# Altium PCB ADConv.PcbDoc
Units mm, origin at the board's own origin, x right, y up, seen from the top; angles counter-clockwise.
Board outline 91 x 102 mm, 2 copper layers (Top Layer, Bottom Layer); 115 components, 64 nets, 341 pads, 67 vias.
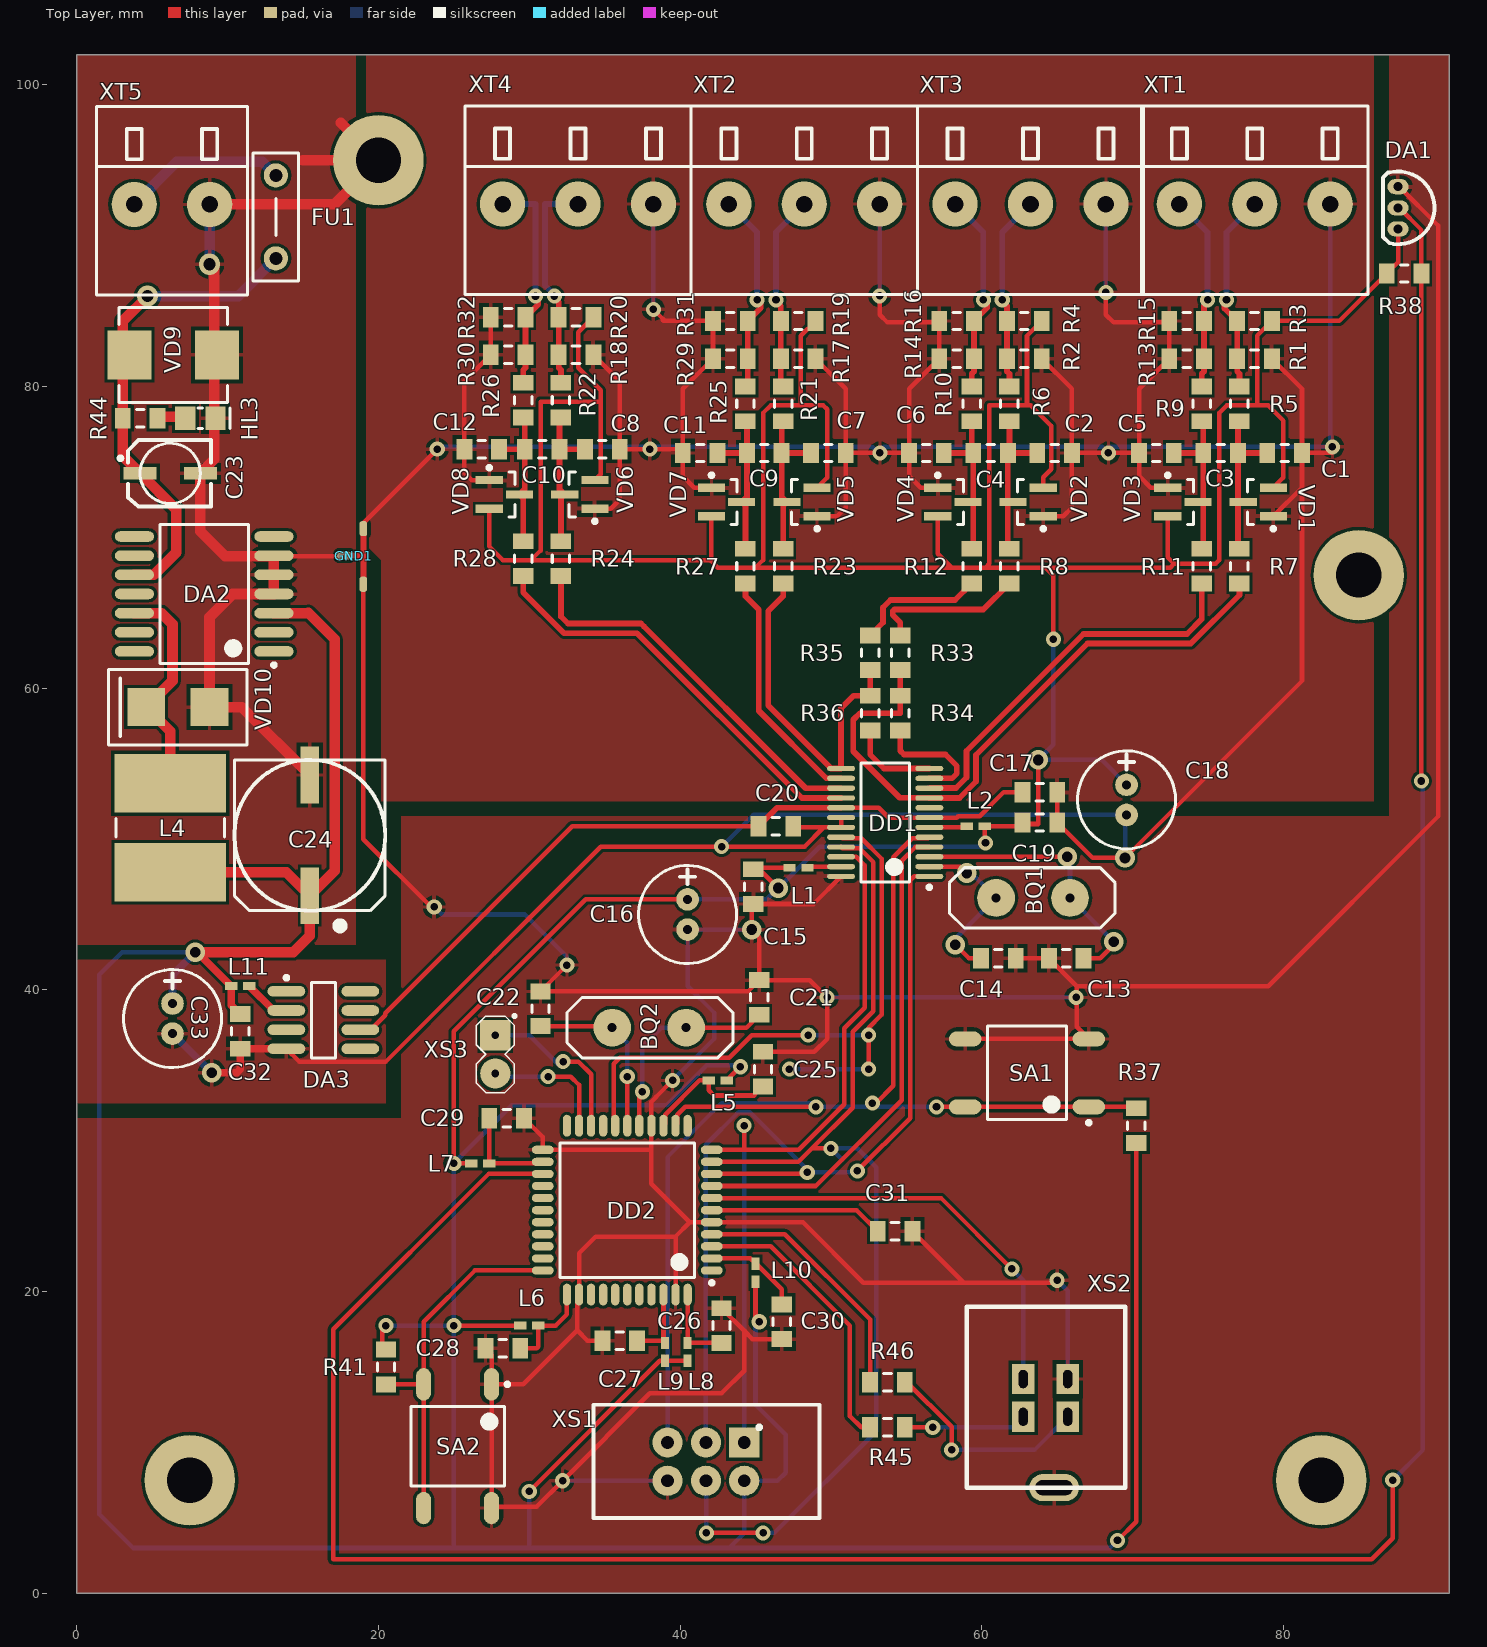
[diagram p0: Top Layer view]
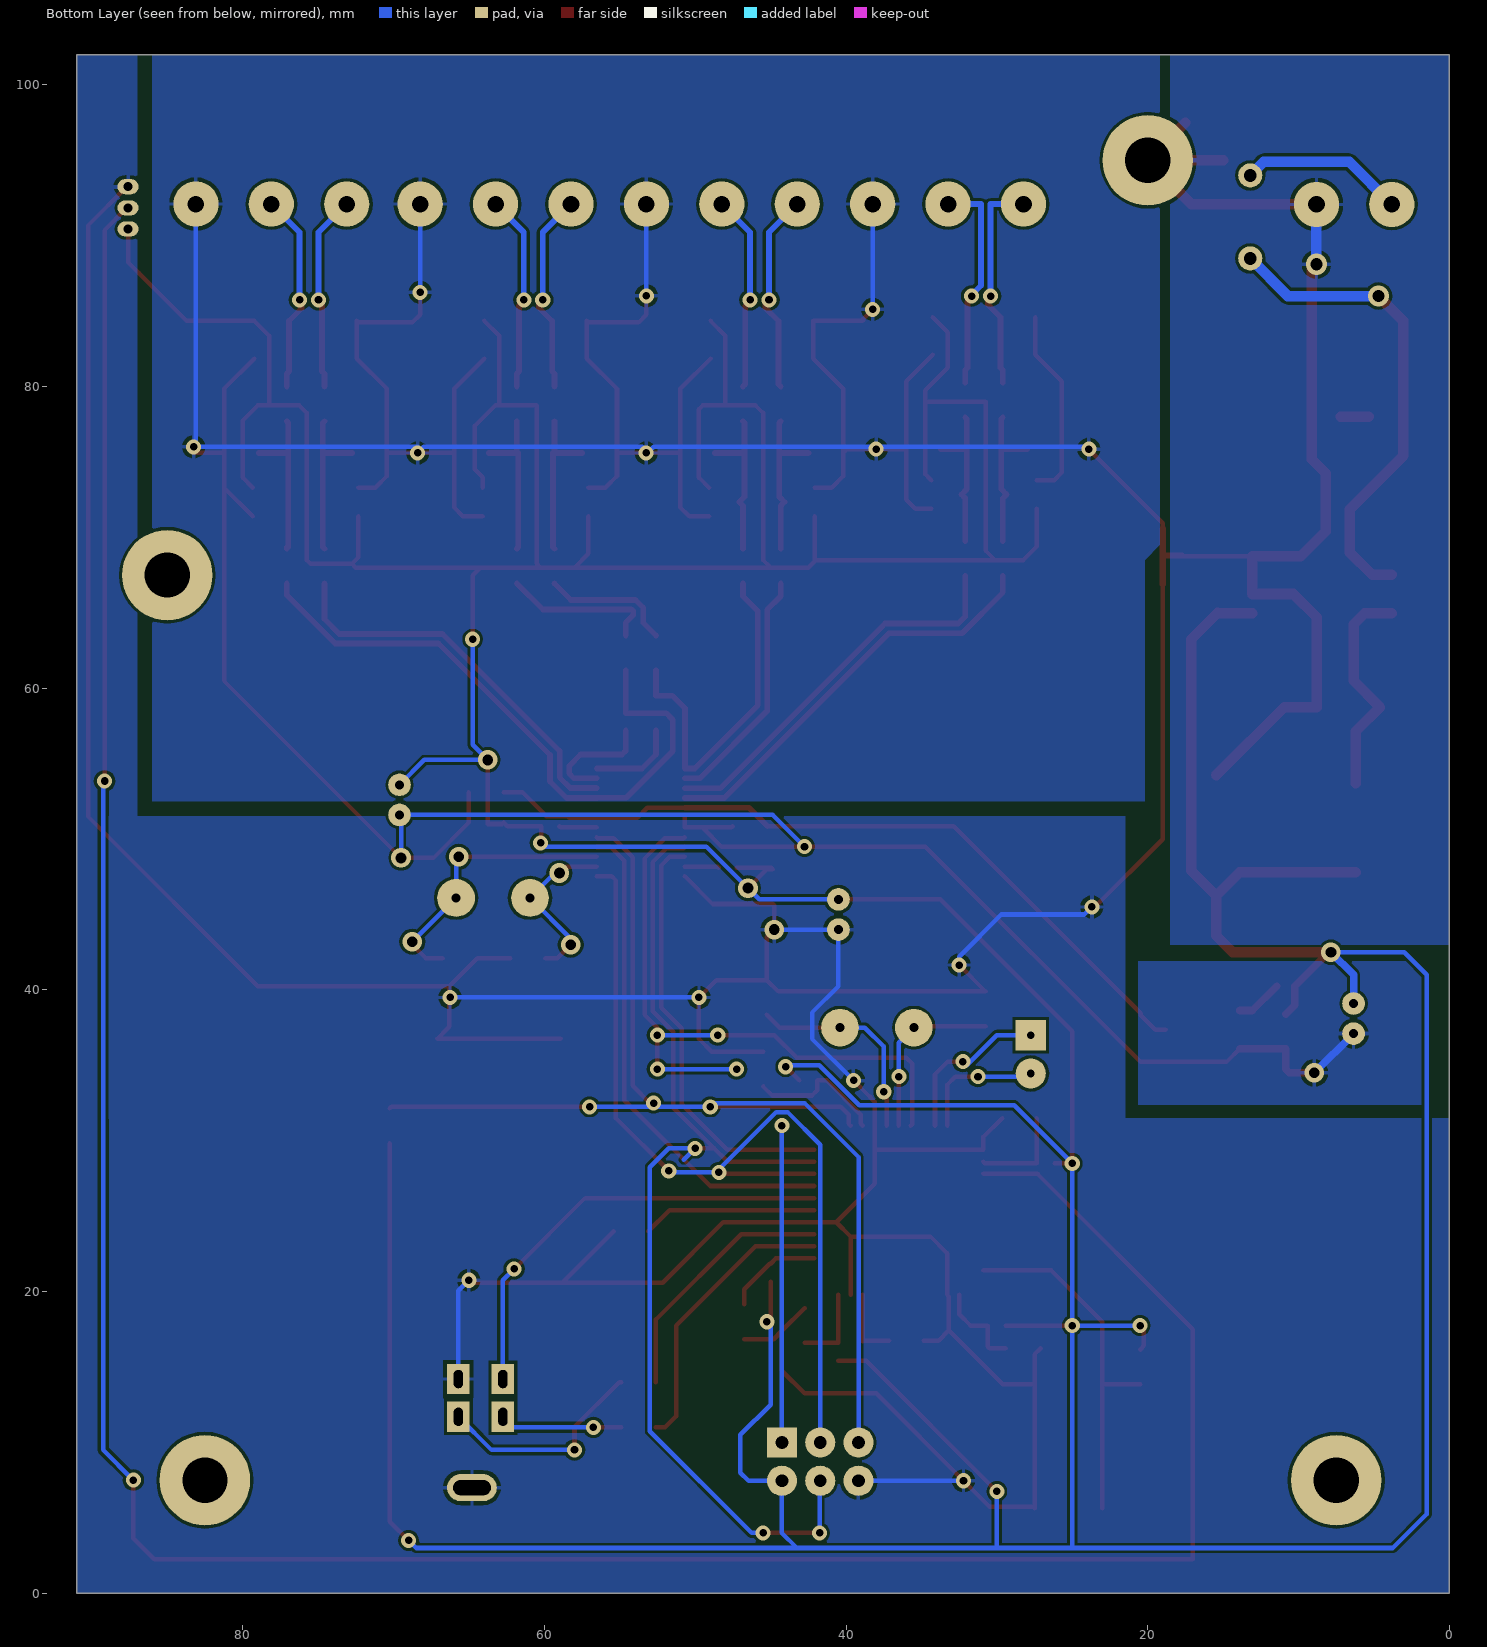
[diagram p1: Bottom Layer view, seen from below]

## Layer stack, top to bottom
Top Solder: solder mask 0.0102, Solder Resist, Dk 3.5
Top Layer: signal copper 0.0356
Dielectric 1: dielectric 0.32, FR-4, Dk 4.8
Bottom Layer: signal copper 0.0356
Bottom Solder: solder mask 0.0102, Solder Resist, Dk 3.5

## Board outline
0,0 91,0 91,102 0,102

## Design rules (kind name [scope] priority, off if disabled: settings)
Clearance Clearance_Poly [InPolygon] p1: gap=0.2
Clearance Clearance_Net [IsNet vs IsNet] p2: gap=0.15
Clearance Clearance_Atmega [(HasFootprint('44ML_L') AND InPadClass('All Pads')) vs (HasFootprint('44ML_L') AND InPadClass('All Pads'))] p3: gap=0.2
Clearance [All] p4: gap=0.254
ComponentClearance 330-031 [(IsComponent AND HasFootprint('330-031-12')) vs (IsComponent AND HasFootprint('330-031-12'))] p1: gap=0 collisioncheckmode=3 verticalgap=0 showdistances=FALSE
ComponentClearance [All] p2: gap=0.254 collisioncheckmode=3 verticalgap=0.254 showdistances=FALSE
DiffPairsRouting [All] p1: maxlimit=0.254 minlimit=0.254 mostfreqgap=0.254 toplayer_minwidth=0.381 toplayer_maxwidth=0.381 toplayer_prefwidth=0.381 bottomlayer_minwidth=0.381 bottomlayer_maxwidth=0.381 bottomlayer_prefwidth=0.381 maxuncoupledlength=12.7
HoleSize [All And (Not (IsVia))] p1: absolutevalues=TRUE maxlimit=2.54 minlimit=0.6 maxpercent=80.000 minpercent=20.000
MinimumSolderMaskSliver [All] p1: minsoldermaskwidth=0.075
PolygonConnect [All] p1: connectstyle=Relief reliefconductorwidth=0.254 reliefentries=4 polygonreliefangle="90 Angle" airgapwidth=0.254
RoomDefinition U_Power [InComponentClass('U_Power')] p1: confinementstyle=ConfineIn formatcopy=TRUE lockcomponents=FALSE outline -0.058,13.25 57,13.25 57,100.591 -0.058,100.591
RoomDefinition U_USB [InComponentClass('U_USB')] p2: confinementstyle=ConfineIn formatcopy=TRUE lockcomponents=FALSE outline 71.75,43.4 21.35,43.4 21.35,1.5 71.75,1.5
RoomDefinition U_Main [InComponentClass('U_Main')] p3: confinementstyle=ConfineIn formatcopy=TRUE lockcomponents=FALSE outline 19,1.6 90.25,1.6 90.25,100.6 19,100.6
RoomDefinition U_DiffInput [InComponentClass('U_DiffInput')] p4: confinementstyle=ConfineIn formatcopy=TRUE lockcomponents=FALSE outline 23.1,65.6 87.85,65.6 87.85,85.85 23.1,85.85
RoutingVias [All] p1: holewidth=0.9 width=1.5 viastyle="Through Hole" minholewidth=0.5 minwidth=1 maxholewidth=0.8 maxwidth=1.4
SolderMaskExpansion [All] p1: expansion=0.102
Width [All] p1: maxlimit=0.7 minlimit=0.3 preferedwidth=0.5
25 further rules are at their usual default settings.

## Classes and differential pairs
component class U_DiffInput: C1 C2 C3 C4 C5 C6 C7 C8 C9 C10 C11 C12 R1 R2 R3 R4 R5 R6 R7 R8 R9 R10 R11 R12 R13 R14 R15 R16 R17 R18 R19 R20 R21 R22 R23 R24 R25 R26 R27 R28 R29 R30 R31 R32 VD1 VD2 VD3 VD4 VD5 VD6 VD7 VD8
component class U_Main: BQ1 BQ2 C13 C14 C15 C16 C17 C18 C19 C20 C21 C22 DA1 DD1 L1 L2 R33 R34 R35 R36 R37 R38 R41 SA1 SA2 XS1 XS3 XT1 XT2 XT3 XT4
component class U_Power: C23 C24 C25 C26 C27 C28 C29 C30 C31 C32 C33 DA2 DA3 FU1 GND1 HL3 L4 L5 L6 L7 L8 L9 L10 L11 R44 VD9 VD10 XT5
component class U_USB: DD2 R45 R46 XS2
differential pair DINPUT1: +DINPUT1_P -DINPUT1_N
differential pair DINPUT2: +DINPUT2_P -DINPUT2_N
differential pair DINPUT3: +DINPUT3_P -DINPUT3_N
differential pair DINPUT4: +DINPUT4_P -DINPUT4_N
differential pair INPUT_FD1: +INPUT_FD1_P -NetC3_1
differential pair INPUT_FD2: +INPUT_FD2_P -INPUT_FD2_N
differential pair INPUT_FD3: +INPUT_FD3_P -INPUT_FD3_N
differential pair INPUT_FD4: +INPUT_FD4_P -INPUT_FD4_N
differential pair INPUT_P1: +INPUT_P1_P -INPUT_P1_N
differential pair INPUT_P2: +INPUT_P2_P -INPUT_P2_N
differential pair INPUT_P3: +INPUT_P3_P -INPUT_P3_N
differential pair INPUT_P4: +INPUT_P4_P -INPUT_P4_N

## Components (designator, comment, footprint, x,y, rotation, side; value= is the part's Value field where it differs from the comment)
BQ1 "6 МГц" HC-49/S 65.85,46.1 r180 top
BQ2 "16 МГц" HC-49/S 35.5,37.5 r0 top
C1 "10n" SMDRC0805 80.082,75.6 r0 top
C2 "10n" SMDRC0805 64.832,75.6 r0 top
C3 "100n" SMDRC0805 75.832,75.6 r0 top
C4 "100n" SMDRC0805 60.582,75.6 r0 top
C5 "10n" SMDRC0805 71.582,75.6 r0 top
C6 "10n" SMDRC0805 56.332,75.6 r0 top
C7 "10n" SMDRC0805 49.832,75.6 r0 top
C8 "10n" SMDRC0805 34.85,75.85 r0 top
C9 "100n" SMDRC0805 45.582,75.6 r0 top
C10 "100n" SMDRC0805 30.85,75.85 r0 top
C11 "10n" SMDRC0805 41.332,75.6 r0 top
C12 "10n" SMDRC0805 26.85,75.85 r0 top
C13 "20p" SMDRC0805 65.6,42.1 r0 top
C14 "20p" SMDRC0805 61.1,42.1 r180 top
C15 "100n" SMDRC0805 44.85,46.85 r270 top
C16 "К-50-6" К50-6 40.5,45 r90 top
C17 "100n" SMDRC0805 63.85,53.1 r180 top
C18 "К-50-6" К50-6 69.6,52.6 r90 top
C19 "100n" SMDRC0805 63.85,51.1 r0 top
C20 "100n" SMDRC0805 46.35,50.85 r0 top
C21 "20p" SMDRC0805 45.25,39.5 r270 top
C22 "20p" SMDRC0805 30.75,38.75 r270 top
C23 "CA050M2R20REB-0405" CAP_POLAR_ELLYTE_B 6.2,74.25 r0 top
C24 "CA035M0220REG" CAP_POLAR_ELLYTE_G 15.45,50.25 r270 top
C25 "100n" SMDRC0805 45.5,34.75 r90 top
C26 "100n" SMDRC0805 42.75,17.75 r90 top
C27 "100n" SMDRC0805 36,16.75 r180 top
C28 "100n" SMDRC0805 28.25,16.25 r180 top
C29 "100n" SMDRC0805 28.5,31.5 r0 top
C30 "100n" SMDRC0805 46.75,18 r270 top
C31 "1u" SMDRC0805 54.25,24 r0 top
C32 "100n" SMDRC0805 10.85,37.25 r90 top
C33 "К-50-6" К50-6 6.35,38.1 r90 top
DA1 "DS1820" L78L09 87.6,91.85 r0 top
DA2 "LM2574M-5.0" SOIC127P1030X264-14M 8.45,66.25 r180 top
DA3 "ADR421BRZ" SO8 16.35,38 r0 top
DD1 "AD7739BRUZ" TSSOP-RU-24 53.6,51.1 r180 top
DD2 "ATMega32U4-AU" 44ML_L 36.5,25.4 r180 top
FU1 "EFuse LP60-110F" "EFuse 1.1A" 13.2,94 r270 top
GND1 "ComGND" ComGND 19,68.8 r270 top net-tie
HL3 "Green" DIOMELF2012M 8.2,77.9 r0 top
L1 "MPZ1608S181A" INDC0603X03M 47.85,48.1 r180 top
L2 "MPZ1608S181A" INDC0603X03M 59.6,50.85 r180 top
L4 "SCD0705T-331K-N" INDP7972X50M 6.2,50.75 r90 top
L5 "MPZ1608S181A" INDC0603X03M 42.5,34 r180 top
L6 "MPZ1608S181A" INDC0603X03M 30,17.75 r0 top
L7 "MPZ1608S181A" INDC0603X03M 26.75,28.5 r0 top
L8 "MPZ1608S181A" INDC0603X03M 40.5,16 r90 top
L9 "MPZ1608S181A" INDC0603X03M 39,16 r90 top
L10 "MPZ1608S181A" INDC0603X03M 45,21.25 r90 top
L11 "MPZ1608S181A" INDC0603X03M 10.85,40.25 r180 top
R1 "10M" SMDRC0805 78.082,81.85 r0 top
R2 "10M" SMDRC0805 62.832,81.85 r0 top
R3 "10M" SMDRC0805 78.082,84.35 r0 top
R4 "10M" SMDRC0805 62.832,84.35 r0 top
R5 "100k" SMDRC0805 77.082,78.85 r270 top
R6 "100k" SMDRC0805 61.832,78.85 r270 top
R7 "30" SMDRC0805 77.082,68.1 r270 top
R8 "30" SMDRC0805 61.832,68.1 r270 top
R9 "100k" SMDRC0805 74.582,78.85 r270 top
R10 "100k" SMDRC0805 59.332,78.85 r270 top
R11 "30" SMDRC0805 74.582,68.1 r270 top
R12 "30" SMDRC0805 59.332,68.1 r270 top
R13 "10M" SMDRC0805 73.582,81.85 r0 top
R14 "10M" SMDRC0805 58.332,81.85 r0 top
R15 "10M" SMDRC0805 73.582,84.35 r0 top
R16 "10M" SMDRC0805 58.332,84.35 r0 top
R17 "10M" SMDRC0805 47.832,81.85 r0 top
R18 "10M" SMDRC0805 33.1,82.1 r0 top
R19 "10M" SMDRC0805 47.832,84.35 r0 top
R20 "10M" SMDRC0805 33.1,84.6 r0 top
R21 "100k" SMDRC0805 46.832,78.85 r270 top
R22 "100k" SMDRC0805 32.1,79.1 r270 top
R23 "30" SMDRC0805 46.832,68.1 r270 top
R24 "30" SMDRC0805 32.1,68.6 r270 top
R25 "100k" SMDRC0805 44.332,78.85 r270 top
R26 "100k" SMDRC0805 29.6,79.1 r270 top
R27 "30" SMDRC0805 44.332,68.1 r270 top
R28 "30" SMDRC0805 29.6,68.6 r270 top
R29 "10M" SMDRC0805 43.332,81.85 r0 top
R30 "10M" SMDRC0805 28.6,82.1 r0 top
R31 "10M" SMDRC0805 43.332,84.35 r0 top
R32 "10M" SMDRC0805 28.6,84.6 r0 top
R33 "1" SMDRC0805 54.6,62.35 r270 top
R34 "1" SMDRC0805 54.6,58.35 r270 top
R35 "1" SMDRC0805 52.6,62.35 r270 top
R36 "1" SMDRC0805 52.6,58.35 r270 top
R37 "10k" SMDRC0805 70.25,31 r270 top
R38 "4,7k" SMDRC0805 88,87.5 r180 top
R41 "10k" SMDRC0805 20.5,15 r90 top
R44 "750" SMDRC0805 4.2,77.9 r180 top
R45 "22" SMDRC0805 53.75,11 r0 top
R46 "22" SMDRC0805 53.75,14 r0 top
SA1 "DTSM20-4.3" DTSM20 63,34.5 r180 top
SA2 "DTSM20-4.3" DTSM20 25.25,9.75 r270 top
VD1 "BAV199" "SOT23 (TO-236AB)" 78.332,72.35 r180 top
VD2 "BAV199" "SOT23 (TO-236AB)" 63.082,72.35 r180 top
VD3 "BAV199" "SOT23 (TO-236AB)" 73.332,72.35 r0 top
VD4 "BAV199" "SOT23 (TO-236AB)" 58.082,72.35 r0 top
VD5 "BAV199" "SOT23 (TO-236AB)" 48.082,72.35 r180 top
VD6 "BAV199" "SOT23 (TO-236AB)" 33.35,72.85 r180 top
VD7 "BAV199" "SOT23 (TO-236AB)" 43.082,72.35 r0 top
VD8 "BAV199" "SOT23 (TO-236AB)" 28.35,72.85 r0 top
VD9 "SM15T12CA" SUPRES3216X18N 6.4,82.1 r180 top
VD10 "10BQ060TRPBF" "SHOTKY 4.1x3.3" 6.7,58.75 r180 top
XS1 "IDC-06M" IDC-06M 44.25,10 r270 top
XS2 "USB B A-09 РОЗЕТКА НА ПЛАТУ" USB2.0B_Vertical 69.5,7 r90 top
XS3 "PLS-02" PLS-02 27.75,37 r270 top
XT1 "330-031-12" 330-031-12 83.1,92.1 r180 top
XT2 "330-031-12" 330-031-12 53.232,92.1 r180 top
XT3 "330-031-12" 330-031-12 68.232,92.1 r180 top
XT4 "330-031-12" 330-031-12 38.232,92.1 r180 top
XT5 "330-021-12" 330-021-12 3.81,92.075 r0 top

## Footprints (in the part's own frame and the unit in brackets; to place one, negate y for a bottom-side part, rotate by r counter-clockwise, add the part's x,y. Pads: shape width x height; smd on the part's side, far side on the other; paste and mask are expansions set on the pad)
44ML_L [mm] "Thin QFP, 44-Leads, Body 10x10mm, Pitch 0.8mm, IPC High Density"
  oval 1.45x0.55 smd: 1(-5.6,4) 2(-5.6,3.2) 3(-5.6,2.4) 4(-5.6,1.6) 5(-5.6,0.8) 6(-5.6,0) 7(-5.6,-0.8) 8(-5.6,-1.6) 9(-5.6,-2.4) 10(-5.6,-3.2) 11(-5.6,-4) 23(5.6,-4) 24(5.6,-3.2) 25(5.6,-2.4) 26(5.6,-1.6) 27(5.6,-0.8) 28(5.6,0) 29(5.6,0.8) 30(5.6,1.6) 31(5.6,2.4) 32(5.6,3.2) 33(5.6,4)
  oval 0.55x1.45 smd: 12(-4,-5.6) 13(-3.2,-5.6) 14(-2.4,-5.6) 15(-1.6,-5.6) 16(-0.8,-5.6) 17(0,-5.6) 18(0.8,-5.6) 19(1.6,-5.6) 20(2.4,-5.6) 21(3.2,-5.6) 22(4,-5.6) 34(4,5.6) 35(3.2,5.6) 36(2.4,5.6) 37(1.6,5.6) 38(0.8,5.6) 39(0,5.6) 40(-0.8,5.6) 41(-1.6,5.6) 42(-2.4,5.6) 43(-3.2,5.6) 44(-4,5.6)
  silkscreen extent -5.72,-4.45 4.45,4.95, body extent -5,-5 5,5, height 1.2
330-021-12 [mm]
  round 3 hole 1.1: 1(0,0) 2(5,0)
  silkscreen extent -2.5,-6 7.5,6.5, body extent -2.5,-6.5 7.5,6, height 12.5
330-031-12 [mm]
  round 3 hole 1.1: 1(0,0) 2(5,0) 3(10,0)
  silkscreen extent -2.5,-6.5 12.5,6, body extent -2.5,-6.5 12.5,6, height 12.5
CAP_POLAR_ELLYTE_B [mm] "Surface Mount Aluminum Electrolytic (size code B)"
  rect 2.2x0.85 smd: 1(2,0) 2(-2,0)
  silkscreen extent -3.42,-2.2 2.7,2.2, body extent -2.3,-2.15 2.3,2.15, height 5.41
CAP_POLAR_ELLYTE_G [mm] "Surface Mount Aluminum Electrolytic (size code G)"
  rect 3.75x1.2 smd: 1(-4,0) 2(4,0)
  silkscreen extent -5,-5 6.25,5, body extent -5.8,-5.15 5.8,5.15, height 10.21
ComGND [mm]
  rrect70% 1x0.5 smd: 1(-1.778,0) 3(1.905,0)
  rrect70% 0.5x1 smd: 2(0,-1.27)
  Top Layer lines w0.4: 0,-1.27 0,0 ; 1.905,0 -1.778,0
DIOMELF2012M [mm] "MELF Diode, 2-Leads, Body 2,00x1,20mm, IPC Low Density"
  rect 1.35x1.55 smd: 1(-1,0) 2(1,0)
  silkscreen extent -0.15,-0.67 1.97,0.67, body extent -1,-0.6 1,0.6, height 1.2
DTSM20 [mm] "DTSM20 button footprint"
  oval 2.15x1 smd: 1(-4.1,2.25) 1(4.1,2.25) 2(-4.1,-2.25) 2(4.1,-2.25)
  silkscreen extent -4.23,-3.1 2.63,3.42, body extent -3.1,-3.1 3.1,3.1, height 5.5
"EFuse 1.1A" [mm]
  round 1.6 hole 0.85: 1(0,0) 2(5.5,0)
  silkscreen extent -1.5,-1.5 7,1.5, body extent -3.23,-0.5 8.73,0.5, height 12.99
HC-49/S [mm]
  round 2.5 hole 0.6: 1(0,0) 2(4.9,0)
  silkscreen extent -3,-2 8,2, body extent -3.5,-2.5 8.5,2.5, height 3.5
IDC-06M [mm]
  rect 2x2 hole 0.85: 1(0,0)
  round 2 hole 0.85: 2(2.54,0) 3(0,-2.54) 4(2.54,-2.54) 5(0,-5.08) 6(2.54,-5.08)
  silkscreen extent -2.5,-10 5,5, body extent -2.5,-10 5,5, height 8.4
INDC0603X03M [mm] "Chip Inductor, 2-Leads, Body 0,60x0,30mm, IPC Low Density"
  rect 0.82x0.52 smd: 1(-0.595,0) 2(0.595,0)
  body extent -0.3,-0.15 0.3,0.15, height 0.3
INDP7972X50M [mm] "Precision Wire Wound Inductor, 2-Leads, Body 7,90x7,20mm, IPC Low Density"
  rect 3.9x7.4 smd: 1(-2.95,0) 2(2.95,0)
  silkscreen extent -0.6,-3.6 0.6,3.6, body extent -3.95,-3.6 3.95,3.6, height 5
L78L09 [mm] "TO-92"
  oval 1.4x1 hole 0.6: 1(0,1.4) 2(0,0) 3(0,-1.4)
  silkscreen extent -1,-2.41 2.41,2.41
PLS-02 [mm] "вилка на плату"
  rect 2x2 hole 0.5: 1(0,0)
  round 2 hole 0.5: 2(2.54,0)
  silkscreen extent -1.37,-1.27 3.81,1.37, body extent -1.27,-1.25 3.81,1.25, height 8.6
"SHOTKY 4.1x3.3" [mm]
  rect 2.5x2.5 smd: A(-2.1,0) K(2.1,0)
  silkscreen extent -4.6,-2.5 4.6,2.5
SMDRC0805 [mm] "Chip Resistor, 2-Leads, Body 2,00x1,20mm, IPC Low Density"
  rect 1.05x1.35 smd: 1(-1.15,0) 2(1.15,0)
  silkscreen extent -0.25,-0.58 0.25,0.58, body extent -1,-0.6 1,0.6, height 0.4
SO8 [mm] "SOIC, 8-Leads, Body 4,90x3,90mm, Pitch 1,27mm, IPC Low Density"
  oval 2.5x0.7 smd: 1(-2.45,1.905) 2(-2.45,0.635) 3(-2.45,-0.635) 4(-2.45,-1.905) 5(2.45,-1.905) 6(2.45,-0.635) 7(2.45,0.635) 8(2.45,1.905)
  silkscreen extent -2.57,-2.5 0.8,2.93, body extent -2,-2.5 2,2.5, height 1.75
SOIC127P1030X264-14M [mm] "SOIC, 14-Leads, Body 8,99x7,49mm, Pitch 1,27mm, IPC Low Density"
  oval 2.6x0.7 smd: 1(-4.625,3.81) 2(-4.625,2.54) 3(-4.625,1.27) 4(-4.625,0) 5(-4.625,-1.27) 6(-4.625,-2.54) 7(-4.625,-3.81) 8(4.625,-3.81) 9(4.625,-2.54) 10(4.625,-1.27) 11(4.625,0) 12(4.625,1.27) 13(4.625,2.54) 14(4.625,3.81)
  silkscreen extent -4.75,-4.6 2.93,4.83, body extent -3.8,-4.6 3.8,4.6, height 2.65
"SOT23 (TO-236AB)" [mm] "SOT23, 3-Leads, Body 2,90x2,45mm, Pitch 0,95mm, IPC Low Density"
  rect 1.8x0.55 smd: 1(-1,0.95) 2(-1,-0.95) 3(1,0)
  silkscreen extent -1.13,-1.5 0.7,1.9, body extent -0.7,-1.5 0.7,1.5, height 1.1
SUPRES3216X18N [mm]
  rect 2.9x3.25 smd: 1(-2.9,0) 2(2.9,0)
  silkscreen extent -3.6,-3.15 3.6,3.15, body extent -3.57,-3.13 3.58,3.13, height 2.65
TSSOP-RU-24 [mm] "TSOP, 24-Leads, Body 7,80x4,40mm, Pitch 0,65mm, IPC Low Density"
  oval 1.85x0.35 smd: 1(-2.925,3.575) 2(-2.925,2.925) 3(-2.925,2.275) 4(-2.925,1.625) 5(-2.925,0.975) 6(-2.925,0.325) 7(-2.925,-0.325) 8(-2.925,-0.975) 9(-2.925,-1.625) 10(-2.925,-2.275) 11(-2.925,-2.925) 12(-2.925,-3.575) 13(2.925,-3.575) 14(2.925,-2.925) 15(2.925,-2.275) 16(2.925,-1.625) 17(2.925,-0.975) 18(2.925,-0.325) 19(2.925,0.325) 20(2.925,0.975) 21(2.925,1.625) 22(2.925,2.275) 23(2.925,2.925) 24(2.925,3.575)
  silkscreen extent -3.05,-3.95 1.6,4.42, body extent -2.25,-3.95 2.25,3.95, height 1.2
USB2.0B_Vertical [mm] "Connector; USB1.1, Type B, Thru-Hole; 4 Position; Right Angle"
  rect 2x1.5 hole 0.6 slot 1.2 at 0 deg: D+(4.7,3.8) D-(4.7,6.75) GND(7.2,3.8) VCC(7.2,6.75)
  oval 1.8x3.3 hole 1 slot 2.5 at 90 deg: SHLD(0,4.7)
  silkscreen extent 0,0 12,10.5, body extent 0,0 12,10.5, height 16
К50-6 [mm]
  round 1.5 hole 0.6: 1(-1,0) 2(1,0)
  silkscreen extent -3.25,-3.25 3.25,3.25, body extent -3.08,-2.99 3,2.99, height 15.1

## Part data
BQ1: library part Piezoelectric_6000, "Piezoelectric elements"
BQ2: library part Piezoelectric_16000, "Piezoelectric elements"
C1 C2 C5 C6 C7 C8 C11 C12: library part "Capacitor 0805 10n", "Generic capasitor non-polar"
C3 C4 C9 C10 C15 C17 C19 C20 C25 C26 C27 C28 C29 C30 C32: library part "Capacitor 0805 100n", "Generic capasitor non-polar"
C13 C14 C21 C22: library part "Capacitor 0805 20p", "Generic capasitor non-polar"
C16 C18 C33: library part 10000_006-К50, "10uF 6,3V Polar through-hole cap"
C23: library part 02200_050, "2,2uF 50V Polar capacitor"
C24: library part 220000_035, "220uF 35V Polar capacitor"
C31: library part "Capacitor 0805 1u", "Generic capasitor non-polar"
DA1: library part T_DS1820, "Precision Micropower Shunt Voltage Reference"
DA3: "IC VREF SERIES 2.5V 8SOIC"
DD1: library part AD7739, "IC ADC 24BIT 8-CH 24-TSSOP"
DD2: library part ATMega32U4
FU1: "Fuse"
HL3: library part LED1_G, "Diod LED SMD Green"
L1 L2 L5 L6 L7 L8 L9 L10 L11: library part "Ferrite Bead", "Ferrite Bead"
L4: "Inductor"
R1 R2 R3 R4 R13 R14 R15 R16 R17 R18 R19 R20 R29 R30 R31 R32: library part "Resistor 0805 10M", "Generic resistor"
R5 R6 R9 R10 R21 R22 R25 R26: library part "Resistor 0805 100k", "Generic resistor"
R7 R8 R11 R12 R23 R24 R27 R28: library part "Resistor 0805 30", "Generic resistor"
R33 R34 R35 R36: library part "Resistor 0805 1", "Generic resistor"
R37 R41: library part "Resistor 0805 10k", "Generic resistor"
R38: library part "Resistor 0805 4,7k", "Generic resistor"
R44: library part "Resistor 0805 750", "Generic resistor"
R45 R46: library part "Resistor 0805 22", "Generic resistor"
SA1 SA2: library part Switch1_DTSM20-4.3, "Switch open"
VD1 VD2 VD3 VD4 VD5 VD6 VD7 VD8: "Epitaxial, medium-speed switching,  double diode in a small SOT23 plastic  SMD package. The diodes are  connected in series."
VD9: "Diod suppressor"
VD10: "DIODE SCHOTTKY 60V 1A DO214AA"
XS1: library part "Con6_M IDC-06M_SPI", "SPI connector"
XS2: library part USB2.0-BR, "USB-B Vertical"
XS3: library part Con2_M_PLS-02, "Male 2-pin connection"
XT1 XT2 XT3 XT4: library part "Con3_D 330-031-12", "Demountable connection 3-pin"
XT5: library part "Con2_D 330-021-12", "Demountable connection  2-pin"

## Free pads (board coordinates)
  round 6 hole 3: 0(7.5,7.5) 0(20,95) 0(82.5,7.5) 0(85,67.5)

## Via types
v1: diameter 1, hole 0.5, Top Layer to Bottom Layer, 55 vias
v2: diameter 1.3, hole 0.711, Top Layer to Bottom Layer, 10 vias
v3: diameter 1.4, hole 0.8, Top Layer to Bottom Layer, 2 vias

## Nets (pads, with @x,y where several pads share a name; then routed paths per layer and width w, separated by ;. In a path a pad name is that pad's centre, name@x,y a point inside that pad or via, vN(x,y) a via of type N, cw(c..) or ccw(c..) an arc to the next point about the centre after c; other vN are vias at no path point)
1WIRE_DATA: DA1.2 DD2.25 R38.1 | length 194
  Top Layer w0.3: DD2.25 27.3,27.8 17,17.5 17,2.25 85.85,2.25 87.25,3.65 v1(87.25,7.5) ; DA1.2 87.678,91.85 89.15,90.378 R38.1 v1(89.15,53.85)
  Bottom Layer w0.3: v1(87.25,7.5) 89.25,9.5 89.25,53.75 v1(89.15,53.85)
+2.5V: C17.2 C20.1 DA3.6 DD1.7 DD1.17 | length 51
  Top Layer w0.3: DA3.6 19.496,37.365 20.454,38.323 20.454,38.454 32.85,50.85 C20.1 ; DD1.17 53.175,52.075 53.825,51.425 DD1.7 58.339,51.425 58.428,51.514 59.859,51.514 61.445,53.1 C17.2
  Top Layer w0.381: C20.1 46.425,52.075 DD1.17
+5V: C15.1 C16.2 C18.2 C19.1 C24.2 C32.2 C33.2 DA1.3 DA2.3 L1.2 L2.1 L4.1 L5.1 L6.1 L7.1 L8.1 L9.1 L10.1 L11.2 R3.2 R4.2 R19.2 R20.2 R37.2 R38.2 R41.2 VD1.2 VD2.2 VD3.2 VD4.2 VD5.2 VD6.2 VD7.2 VD8.2 XS1.2 | length 551.7
  Top Layer w0.3: R41.2 20.25,16.4 20.25,17.5 v1(20.5,17.75) ; v1(25,17.75) L6.1 ; L7.1 v1(25,28.5) 25,37.25 33.75,46 C16.2 ; VD8.2 27.35,69.4 28.25,68.5 30.121,68.5 ; v1(30,6.75) 38.655,15.405 L9.1 L8.1 ; R20.2 33.25,83.6 33.25,81.25 34.75,79.75 34.75,79 ; VD6.2 34.75,74.2 34.75,79 ; 42,68.5 30.121,68.5 ; VD7.2 42.082,68.418 42.5,68 45,68 ; L5.1 v1(44,34.905) ; L10.1 45,18.25 v1(45.25,18) ; v2(46.5,46.75) 45.25,48 C15.1 44.95,48.1 L1.2 ; R19.2 48,83.368 48,78.75 ; VD5.2 49.75,73.968 49.75,78.5 49.5,78.75 48,78.75 ; VD4.2 57.082,68.918 58,68 ; v1(60.25,49.75) 60.195,49.805 L2.1 62.45,50.85 C19.1 62.8,51 63.75,51 v2(63.75,55.25) ; R4.2 63,83.368 63,78.75 ; VD2.2 64.082,73.992 64.611,74.521 64.611,77.389 63.25,78.75 63,78.75 ; v1(64.75,63.25) 64.75,67.5 64.25,68 ; v1(69,3.5) 70.25,4.75 R37.2 ; VD3.2 72.332,68.668 72.75,68.25 ; VD1.2 80,73.968 80,77.75 79,78.75 78.25,78.75 ; DA1.3 87.6,88.25 R38.2 83.7,84.35 R3.2 78.25,83.368 78.25,78.75 ; 30.121,68.5 30.75,69.129 30.75,79 34.75,79 ; 45,68 58,68 ; 45,68 45.5,68.5 45.5,78.25 46,78.75 48,78.75 ; 58,68 60.25,68 ; 60.25,68 64.25,68 ; 60.25,68 60.5,68.25 60.5,78.75 63,78.75 ; 64.25,68 72.5,68 72.75,68.25 ; 72.75,68.25 75.5,68.25 75.75,68.5 75.75,78.25 76.25,78.75 78.25,78.75
  Top Layer w0.5: v2(7.85,42.5) 8.005,42.5 L11.2 10.255,38.995 C32.2
  Top Layer w0.7: L4.1 13.9,47.8 C24.2 ; v2@8.005,42.5 14.35,42.5 15.45,43.6 C24.2 ; DA2.3 15.33,64.98 15.35,65 17.1,63.25 17.1,47.9 C24.2
  Bottom Layer w0.3: v2(7.85,42.5) 3,42.5 1.5,41 1.5,5.25 3.75,3 25,3 ; v1(20.5,17.75) v1(25,17.75) ; v1(30,6.75) 30,3 ; C16.2 45.75,46 v2(46.5,46.75) 49.25,49.5 60.25,49.5 v1(60.25,49.75) ; v1(44,34.905) 44,35 41.778,35 39.124,32.346 28.846,32.346 v1(25,28.5) v1(25,17.75) ; v1(45.25,18) 45,18 45,12.5 47,10.5 47,8 46.46,7.46 XS1.2 44.25,4 43.25,3 ; v1(64.75,63.25) 64.75,56.25 v2(63.75,55.25) 67.95,55.25 C18.2 ; v1(69,3.5) 68.5,3 43.25,3 ; 25,3 30,3 ; 25,3 v1(25,17.75) ; 30,3 43.25,3
  Bottom Layer w0.5: C33.2 6.35,41 v2(7.85,42.5)
AGND: C1.2 C2.2 C5.1 C6.1 C7.2 C8.2 C11.1 C12.1 C17.1 C18.1 C19.2 C20.2 C32.1 C33.1 DA3.4 DD1.18 DD1.19 GND1.1 R1.2 R2.2 R13.1 R14.1 R15.1 R16.1 R17.2 R18.2 R29.1 R30.1 R31.1 R32.1 VD1.1 VD2.1 VD3.1 VD4.1 VD5.1 VD6.1 VD7.1 VD8.1 XT1.1 XT2.1 XT3.1 XT4.1 | length 359.3
  Top Layer w0.3: DA3.4 14.745,35.25 20.5,35.25 34.75,49.5 v1(42.75,49.5) 48.25,49.5 49.525,50.775 ; GND1.1 19,70.95 v1(23.9,75.85) ; VD8.1 26.2,73.8 25.7,74.3 C12.1 25.7,80.35 R30.1 R32.1 ; R18.2 36,80.35 C8.2 ; VD6.1 35.4,71.9 36,72.5 C8.2 ; v1(38.232,85.118) 38.9,84.45 ; 38.85,84.4 38.9,84.35 R31.1 R29.1 40.182,79.85 C11.1 ; VD7.1 40.95,73.3 40.182,74.068 C11.1 ; C20.2 47.575,50.775 49.525,50.775 ; R17.2 50.982,79.85 C7.2 ; VD5.1 50.4,71.4 50.982,71.982 C7.2 ; DD1.18 DD1.19 49.525,50.775 ; v1(53.232,86.018) 53.232,84.768 53.75,84.25 57.082,84.25 R16.1 R14.1 55.182,79.85 C6.1 ; VD4.1 55.95,73.3 55.182,74.068 C6.1 ; R2.2 65.982,79.85 C2.2 ; VD2.1 65.4,71.4 65.982,71.982 C2.2 ; C17.1 C19.2 67.35,48.75 v2(69.5,48.75) 81.232,60.482 81.232,73.3 ; v1(68.232,86.25) 68.232,84.768 68.75,84.25 72.332,84.25 R15.1 R13.1 70.432,79.85 C5.1 ; VD3.1 71.2,73.3 70.432,74.068 C5.1 ; R1.2 81.232,79.85 C1.2 ; VD1.1 81.232,73.3 ; v1@83.25,75.6 C1.2 ; C8.2 v1(38,75.85) 39.932,75.85 C11.1 ; C7.2 v1(53.25,75.6) C6.1 ; C2.2 v1(68.4,75.6) C5.1 ; 81.232,73.3 C1.2
  Top Layer w0.5: v2(8.95,34.5) 10.6,34.5 10.85,34.75 C32.1 13.895,36.1 DA3.4
  Bottom Layer w0.3: v1@23.9,76 v1@38,76 ; v1(38,75.85) v1@38,76 ; v1(38.232,85.118) XT4.1 ; v1(42.75,49.5) 44.85,51.6 C18.1 69.5,51.5 v2(69.5,48.75) ; v1(53.232,86.018) XT2.1 ; v1(53.25,75.6) 53.15,75.6 52.75,76 v1@38,76 ; v1@53.5,76 68,76 v1(68.4,75.6) ; v1(68.232,86.25) XT3.1 ; v1@68.4,76 v1(83.25,76) 83.1,76.15 XT1.1
  Bottom Layer w0.5: C33.1 v2(8.95,34.5)
CS: DD1.4 DD2.8 | length 33
  Top Layer w0.3: DD2.8 49,27 54.696,32.696 54.696,48.565 55.606,49.475 DD1.4
DGND: C13.1 C14.1 C15.2 C16.1 C21.1 C22.1 C25.2 C26.2 C27.2 C28.2 C29.2 C30.2 C31.2 DA1.1 DD1.24 DD2.5 DD2.15 DD2.23 DD2.35 DD2.43 GND1.3 SA1.2 SA2.1 XS1.6 XS2.GND XS2.SHLD | length 327.6
  Top Layer w0.3: GND1.3 19,50 23.5,45.5 v1(23.7,45.5) ; C28.2 27.5,15.85 SA2.1@27.5,13.85 ; C29.2 30.9,30.25 DD2.23 38,29.4 38.1,29.5 ; v1(32.5,41.65) C22.1 44.5,39.9 C21.1 ; C27.2 33.858,16.75 33.179,17.429 ; v1(39.5,34) 38.404,32.904 38.404,32.875 38.1,32.572 DD2.15 38.1,29.5 ; DD2.43 39.7,23.65 ; C26.2 44.25,17.4 ; C25.2 48.9,35.9 49.75,36.75 v1(49.75,39.5) 48.6,40.65 C21.1 ; C30.2 44.8,16.85 44.25,17.4 ; DD1.24 48.846,45.696 44.854,45.696 C15.2 44.75,45.6 v2(44.75,44) 45.25,43.5 C21.1 ; C31.2 58.804,20.596 ; SA1.2@58.9,36.75 67.1,36.75 66.3,37.55 v1@66.3,39.5 ; C14.1 C13.1 66.3,40.25 ; v1@64.75,20.75 v1(65,20.75) 64.846,20.596 58.804,20.596 ; v1(66.25,39.5) v1@66.3,39.5 ; DA1.1 87.678,93.25 90.25,90.678 90.25,51.5 79,40.25 66.3,40.25 ; SA2.1@27.5,13.85 29.6,13.85 33.179,17.429 ; SA2.1@27.5,13.85 27.5,5.65 27.6,5.75 30.5,5.75 v1(32.21,7.46) 38,13.25 42.75,13.25 44.25,14.75 44.25,17.4 ; 33.179,17.429 33.179,19.679 DD2.35 33.3,22.55 34.4,23.65 39.7,23.65 ; 38.1,29.5 38.1,27.15 40.65,24.6 ; 39.7,23.65 40.65,24.6 ; 40.65,24.6 DD2.5 48.15,24.6 52.154,20.596 58.804,20.596 ; v1@66.3,39.5 66.3,40.25
  Bottom Layer w0.3: v1(23.7,45.5) 24.2,45 29.7,45 32.5,42.2 v1(32.5,41.65) ; v1(32.21,7.46) XS1.6 ; v1(39.5,34) 42.25,36.75 42.25,38.5 40.5,40.25 C16.1 v2(44.75,44) ; v1(49.75,39.5) v1(66.25,39.5) ; v1(65,20.75) 65.7,20.05 XS2.GND
DINPUT1_N: R9.1 R13.2 R15.2 XT1.3 | length 13
  Top Layer w0.381: R9.1 74.582,80.85 74.732,81 R13.2 R15.2 74.732,85.35 74.973,85.591 v1(74.973,85.75)
  Bottom Layer w0.381: XT1.3 74.973,90.227 v1(74.973,85.75)
DINPUT1_P: R1.1 R3.1 R5.1 XT1.2 | length 13.3
  Top Layer w0.381: v1(76.227,85.75) 76.1,85.623 76.1,85.182 R3.1 R1.1 76.932,81 77.082,80.85 R5.1
  Bottom Layer w0.381: v1(76.227,85.75) 76.227,90.227 XT1.2
DINPUT2_N: R25.1 R29.2 R31.2 XT2.3 | length 13.4
  Top Layer w0.381: R25.1 44.482,80.15 R29.2 R31.2 45.35,85.218 45.35,85.505 v1(45.105,85.75)
  Bottom Layer w0.381: XT2.3 45.105,90.227 v1(45.105,85.75)
DINPUT2_P: R17.1 R19.1 R21.1 XT2.2 | length 13.1
  Top Layer w0.381: v1(46.359,85.75) 46.359,85.673 46.682,85.35 R19.1 R17.1 46.682,80.15 R21.1
  Bottom Layer w0.381: v1(46.359,85.75) 46.359,90.227 XT2.2
DINPUT3_N: R10.1 R14.2 R16.2 XT3.3 | length 13.4
  Top Layer w0.381: R10.1 59.332,80.85 59.482,81 R14.2 R16.2 60.35,85.218 60.35,85.505 v1(60.105,85.75)
  Bottom Layer w0.381: XT3.3 60.105,90.227 v1(60.105,85.75)
DINPUT3_P: R2.1 R4.1 R6.1 XT3.2 | length 13.1
  Top Layer w0.381: v1(61.359,85.75) 61.359,85.673 61.682,85.35 R4.1 61.682,82.85 R2.1 61.682,81 61.832,80.85 R6.1
  Bottom Layer w0.381: v1(61.359,85.75) 61.359,90.227 XT3.2
DINPUT4_N: R26.1 R30.2 R32.2 XT4.3 | length 14.5
  Top Layer w0.381: R26.1 29.6,81.1 29.75,81.25 R30.2 R32.2 30.6,85.45 30.6,85.815 v1(30.414,86)
  Bottom Layer w0.381: XT4.3 30.414,92.1 v1(30.414,86)
DINPUT4_P: R18.1 R20.1 R22.1 XT4.2 | length 14.5
  Top Layer w0.381: v1(31.668,86) 31.668,85.881 31.95,85.6 R20.1 31.95,83.1 R18.1 31.95,81.25 32.1,81.1 R22.1
  Bottom Layer w0.381: v1(31.668,86) 31.668,86.082 31.049,86.701 31.049,92.1 XT4.2
GND: C23.1 C24.1 DA2.4 DA2.5 DA2.6 GND1.2 HL3.2 pad.0@20,95 VD9.1 VD10.A XT5.2 | length 75.2
  Top Layer w0.3: DA2.6@13.035,68.75 13.075,68.75 GND1.2@17.73,68.75
  Top Layer w0.7: v3(8.81,88.11) 9.12,87.8 9.12,75.17 C23.1 8.2,70.4 9.85,68.75 DA2.6@13.035,68.75 ; XT5.2 17.075,92.075 pad.0@20,95 ; DA2.6@13.075,68.75 DA2.5 DA2.4 10.35,66.25 8.8,64.7 VD10.A 10.95,58.75 C24.1 ; 15,95 pad.0@20,95 ; 17.5,97.5 pad.0@20,95
  Bottom Layer w0.7: v3(8.81,88.11) XT5.2
HWB: DD2.33 R41.1 SA2.2 | length 24.2
  Top Layer w0.3: R41.1 SA2.2@23,13.85 ; SA2.2@23,5.65 SA2.2@23,13.85 ; DD2.33 26.4,21.4 23,18 SA2.2@23,13.85
INPUT_FD1_P: C1.1 C3.2 R5.2 R7.1 VD1.3 | length 10.4
  Top Layer w0.381: R7.1@76.982,69.35 C3.2 ; R7.1 R7.1@77.082,69.35 ; R5.2 76.982,77.6 C3.2 ; C1.1 C3.2
INPUT_FD2_N: C9.1 C11.2 R25.2 R27.1 VD7.3 | length 10.7
  Top Layer w0.381: C11.2 C9.1 ; R27.1 44.332,72.1 VD7.3 44.432,72.7 C9.1 ; R25.2 44.432,77.6 C9.1
INPUT_FD2_P: C7.1 C9.2 R21.2 R23.1 VD5.3 | length 10.7
  Top Layer w0.381: R23.1 46.832,72.1 VD5.3 46.732,72.7 C9.2 ; R21.2 46.732,77.6 C9.2 ; C7.1 C9.2
INPUT_FD3_N: C4.1 C6.2 R10.2 R12.1 VD4.3 | length 10.5
  Top Layer w0.381: C6.2 C4.1 ; R12.1 59.432,69.35 C4.1 ; R10.2 59.332,75.7 C4.1
INPUT_FD3_P: C2.1 C4.2 R6.2 R8.1 VD2.3 | length 10.5
  Top Layer w0.381: R8.1 61.732,69.35 C4.2 ; R6.2 61.832,75.7 C4.2 ; C2.1 C4.2
INPUT_FD4_N: C10.1 C12.2 R26.2 R28.1 VD8.3 | length 10.2
  Top Layer w0.381: C12.2 C10.1 ; R28.1 29.6,72.6 VD8.3 29.7,73.2 C10.1 ; R26.2 29.7,77.85 C10.1
INPUT_FD4_P: C8.1 C10.2 R22.2 R24.1 VD6.3 | length 10.2
  Top Layer w0.381: R24.1 32.1,72.6 VD6.3 32,73.2 C10.2 ; R22.2 32,77.85 C10.2 ; C8.1 C10.2
INPUT_P1_N: DD1.10 R11.2 | length 26.1
  Top Layer w0.381: DD1.10 56.54,53.39 58.288,53.39 58.985,54.087 58.985,55.835 66.75,63.6 73.6,63.6 74.582,64.582 R11.2
INPUT_P1_P: DD1.9 R7.2 R33.2 R34.1 | length 42.5
  Top Layer w0.381: R33.2 R34.1 54.6,58.35 51.921,58.35 51.48,57.909 51.48,55.821 54.562,52.74 56.51,52.74 DD1.9 58.521,52.725 59.62,53.824 59.62,55.572 67.013,62.965 73.863,62.965 77.082,66.184 R7.2
INPUT_P2_N: DD1.14 R27.2 | length 16.1
  Top Layer w0.381: R27.2 44.332,66.1 45.215,65.217 45.215,58.509 49.699,54.025 DD1.14
INPUT_P2_P: DD1.13 R23.2 R35.2 R36.1 | length 23
  Top Layer w0.381: R23.2 46.832,66.1 45.85,65.118 45.85,58.85 50.025,54.675 DD1.13 50.675,58.675 51.5,59.5 R36.1 R35.2
INPUT_P3_N: R12.2 R35.1 | length 8.7
  Top Layer w0.381: R35.1 53.45,64.35 53.45,65.348 53.952,65.85 58.232,65.85 R12.2
INPUT_P3_P: R8.2 R33.1 | length 10.3
  Top Layer w0.381: R33.1 54.6,64.35 54.1,64.85 54.1,65.1 54.215,65.215 60.097,65.215 R8.2
INPUT_P4_N: DD1.16 R28.2 | length 27.8
  Top Layer w0.381: R28.2 29.6,66.35 32.299,63.651 37.151,63.651 48.077,52.725 DD1.16
INPUT_P4_P: DD1.15 R24.2 | length 26
  Top Layer w0.381: R24.2 32.1,64.748 32.562,64.286 37.414,64.286 37.6,64.1 48.325,53.375 DD1.15
MISO: DD1.21 DD2.10 XS1.4 | length 71.1
  Top Layer w0.3: v1(41.75,4) v1(45.5,4) ; DD2.10 47.85,28.6 48.75,29.5 ; v1(50,29.5) 48.75,29.5 ; DD1.21 50.746,49.404 51.879,49.404 52.804,48.479 52.804,38.587 51.446,37.229 51.446,32.196 48.75,29.5
  Bottom Layer w0.3: XS1.4 41.75,7.42 v1(41.75,4) ; v1(45.5,4) 46.25,4 53,10.75 53,28.25 51.75,29.5 v1(50,29.5) 50.75,28.75
MOSI: DD1.22 DD2.11 XS1.1 | length 50.8
  Top Layer w0.3: DD2.11 44.25,29.4 ; v1(44.25,31) 44.25,29.4 ; DD1.22 51.675,48.825 52.25,48.25 52.25,38.817 50.892,37.459 50.892,32.425 47.867,29.4 44.25,29.4
  Bottom Layer w0.3: XS1.1 v1(44.25,31)
NetBQ1_1: BQ1.1 C13.2 DD1.3 | length 18.6
  Top Layer w0.3: DD1.3 v2(65.675,48.825) ; C13.2 67.85,42.1 68.75,43 v2(68.75,43.2)
  Bottom Layer w0.3: v2(65.675,48.825) 65.85,48.65 BQ1.1 v2(68.75,43.2)
NetBQ1_2: BQ1.2 C14.2 DD1.2 | length 11.6
  Top Layer w0.3: DD1.2 58.575,48.175 v2(59,47.75) ; v2(58.25,43) 59.15,42.1 C14.2
  Bottom Layer w0.3: v2(58.25,43) 58.25,43.4 BQ1.2 59.3,47.75 v2(59,47.75)
NetBQ2_1: BQ2.1 C22.2 DD2.17 | length 11.7
  Top Layer w0.3: C22.2 35.4,37.6 BQ2.1 ; DD2.17 v1(36.5,34.25)
  Bottom Layer w0.3: BQ2.1 36.5,36.5 v1(36.5,34.25)
NetBQ2_2: BQ2.2 C21.2 DD2.16 | length 14
  Top Layer w0.3: DD2.16 37.3,33.05 v1(37.5,33.25) ; BQ2.2 44.4,37.5 C21.2
  Bottom Layer w0.3: v1(37.5,33.25) 37.5,36.25 38.75,37.5 BQ2.2
NetC3_1: C3.1 C5.2 R9.2 R11.1 VD3.3 | length 10.5
  Top Layer w0.381: C5.2 C3.1 ; R11.1 74.682,69.35 C3.1 ; R9.2 74.682,77.6 C3.1
NetC23_2: C23.2 DA2.10 FU1.2 R44.2 VD9.2 | length 32.1
  Top Layer w0.7: DA2.10 5.12,67.52 6.6,69 6.6,71.85 C23.2 3.05,75.4 3.05,84.35 v3(4.7,86)
  Bottom Layer w0.7: v3(4.7,86) 10.7,86 FU1.2
NetC25_1: C25.1 DD2.14 L5.2 | length 9.2
  Top Layer w0.3: DD2.14 39.021,31.121 39.021,31.731 41.29,34 L5.2 41.905,33.345 42.25,33 44.9,33 C25.1
NetC26_1: C26.1 DD2.44 L8.2 | length 5.5
  Top Layer w0.3: DD2.44 L8.2 42.745,16.595 C26.1
NetC27_1: C27.1 DD2.42 L9.2 | length 4.9
  Top Layer w0.3: C27.1 38.845,16.75 38.9,16.695 DD2.42
NetC28_1: C28.1 DD2.34 L6.2 | length 6.2
  Top Layer w0.3: C28.1 30.5,16.25 30.595,16.345 L6.2 31.75,17.75 32.5,18.5 DD2.34
NetC29_1: C29.1 DD2.24 L7.2 | length 6.6
  Top Layer w0.3: C29.1 27.35,28.505 L7.2 30.8,28.5 DD2.24
NetC30_1: C30.1 DD2.2 L10.2 | length 6.5
  Top Layer w0.3: DD2.2 44.645,22.2 L10.2 45.051,21.845 46.75,20.146 C30.1
NetC31_1: C31.1 DD2.6 | length 11.6
  Top Layer w0.3: DD2.6 51.7,25.4 C31.1
NetDA2_12: DA2.12 L4.2 VD10.K | length 14.8
  Top Layer w0.7: DA2.12 5.62,64.98 6.35,64.25 6.35,60.5 VD10.K 6.2,57.15 L4.2
NetDA3_2: DA3.2 L11.1 | length 3.1
  Top Layer w0.5: L11.1 13.06,38.635 DA3.2
NetDD1_6: DD1.6 L2.2 | length 2.5
  Top Layer w0.3: DD1.6 58.93,50.775 L2.2
NetDD1_11: DD1.11 R34.2 | length 8
  Top Layer w0.381: R34.2 54.6,55.85 54.85,55.6 57.6,55.6 58.35,54.85 58.35,54.35 58.025,54.025 DD1.11
NetDD1_12: DD1.12 R36.2 | length 5.9
  Top Layer w0.381: R36.2 52.6,55.6 53.525,54.675 DD1.12
NetDD1_23: DD1.23 L1.1 | length 2.3
  Top Layer w0.3: L1.1 48.52,48.175 DD1.23
NetDD2_3: DD2.3 R45.1 | length 19
  Top Layer w0.3: DD2.3 46,23 51.25,17.75 51.25,11.75 52,11 R45.1
NetDD2_4: DD2.4 R46.1 | length 17
  Top Layer w0.3: DD2.4 46.95,23.8 52.6,18.15 R46.1
NetDD2_7: DD2.7 XS2.VCC | length 29.5
  Top Layer w0.3: DD2.7 57.3,26.2 v1(62,21.5)
  Bottom Layer w0.3: v1(62,21.5) 62.75,20.75 XS2.VCC
NetDD2_20: DD2.20 XS3.1 | length 11
  Top Layer w0.3: v1(32.25,35.25) 33.25,35.25 34.1,34.4 DD2.20
  Bottom Layer w0.3: XS3.1 30,37 32,35 v1(32.25,35.25)
NetDD2_21: DD2.21 XS3.2 | length 8.6
  Top Layer w0.3: v1(31.25,34.25) 32.75,34.25 33.3,33.7 DD2.21
  Bottom Layer w0.3: XS3.2 27.96,34.25 v1(31.25,34.25)
NetFU1_1: FU1.1 XT5.1 | length 10.9
  Bottom Layer w0.7: XT5.1 6.635,94.9 12.3,94.9 FU1.1
NetHL3_1: HL3.1 R44.1 | length 1.9
  Top Layer w0.7: R44.1@5.35,78 HL3.1@7.2,78
NetR45_2: R45.2 XS2.D- | length 8.1
  Top Layer w0.3: R45.2 v1(56.75,11)
  Bottom Layer w0.3: v1(56.75,11) 62.05,11 XS2.D-
NetR46_2: R46.2 XS2.D+ | length 14.5
  Top Layer w0.3: R46.2 55.028,14 58,11.028 v1(58,9.5)
  Bottom Layer w0.3: v1(58,9.5) 63.5,9.5 XS2.D+
RDY: DD1.20 DD2.18 | length 44.7
  Top Layer w0.3: DD2.18 35.596,31.104 35.596,35.096 36,35.5 43.25,35.5 44.75,37 v1(48.5,37) ; DD1.20 50.746,50.054 52.013,50.054 53.358,48.709 53.358,38.358 52.5,37.5 v1(52.5,37) v1(52.5,34.75)
  Bottom Layer w0.3: v1(47.25,34.75) v1(52.5,34.75) ; v1(48.5,37) v1(52.5,37)
RESET: DD1.5 DD2.13 R37.1 SA1.1 XS1.5 | length 81.9
  Top Layer w0.3: DD2.13 39.821,31.121 39.821,31.731 40.34,32.25 v1(49,32.25) ; v1(52.75,32.5) 53,32.5 54.142,33.642 54.142,48.794 55.402,50.054 56.454,50.054 DD1.5 ; v1(57,32.25) 58.9,32.25 67.1,32.25 70.15,32.25 R37.1
  Bottom Layer w0.3: XS1.5 39.17,28.92 42.75,32.5 48.75,32.5 v1(49,32.25) v1@52.75,32.25 ; v1(52.75,32.5) 53,32.25 v1(57,32.25)
SCLK: DD1.1 DD2.9 XS1.3 | length 60.9
  Top Layer w0.3: DD2.9 48.328,27.8 v1(48.432,27.904) ; v1(51.75,28) 55.25,31.5 55.25,47.25 55.525,47.525 DD1.1
  Bottom Layer w0.3: XS1.3 41.71,29.738 43.876,31.904 44.624,31.904 48.432,28.096 v1(48.432,27.904) 51.654,27.904 v1(51.75,28)
pads on no net: DA2.1 DA2.2 DA2.7 DA2.8 DA2.9 DA2.11 DA2.13 DA2.14 DA3.1 DA3.3 DA3.5 DA3.7 DA3.8 DD1.8 DD2.1 DD2.12 DD2.19 DD2.22 DD2.26 DD2.27 DD2.28 DD2.29 DD2.30 DD2.31 DD2.32 DD2.36 DD2.37 DD2.38 DD2.39 DD2.40 DD2.41

## Polygon pours and split planes (outlines as drawn)
GND on Top Layer "TOP Layer-GND" (solid, remove dead copper, pour order 13): 0,102 18.5,102 18.5,43 0,43
DGND on Top Layer "TOP Layer-DGND" (solid, remove dead copper, pour order 17): 87,102 91,102 91,0 0,0 0,31.5 23.5,31.5 23.5,51.5 24,51 87,51
AGND on Top Layer "TOP Layer-DGND" (solid, remove dead copper, pour order 19): 0,42 20.5,42 20.5,32.5 0,32.5
DGND on Top Layer "TOP Layer-DGND" (solid, remove dead copper, pour order 21): 21.5,31.5 21.5,51.5 91,51.5 91,31.371
AGND on Top Layer "TOP Layer-AGND" (solid, remove dead copper, pour order 15): 19.2,102 19.2,70 19.2,69.5 20.205,68.5 20.205,52.5 86,52.5 86,102
AGND on Bottom Layer "botLayer-DGND" (solid, remove dead copper, pour order 18): 0.137,41.9 20.637,41.9 20.637,32.4 0.137,32.4
GND on Bottom Layer "TOP Layer-GND" (solid, remove dead copper, pour order 12): 0,102 18.5,102 18.5,43 0,43
AGND on Bottom Layer "botLayer-AGND" (solid, remove dead copper, pour order 14): 19.2,102 19.2,70 19.2,69.5 20.205,68.5 20.205,52.5 86,52.5 86,102
DGND on Bottom Layer "botLayer-DGND" (solid, remove dead copper, pour order 16): 87,102 91,102 91,0 0,0 0,31.5 23.5,31.5 23.5,51.5 24,51 87,51
DGND on Bottom Layer "BotLayer-DGND" (solid, remove dead copper, pour order 20): 21.5,31.5 21.5,51.5 91,51.5 91,31.371

## Silkscreen, mask and mechanical layers (free items; w line width, h text height)
Mechanical 4:
  the board outline again, w1.2